# EAGLE board v1 (EAGLE 7.3.0)
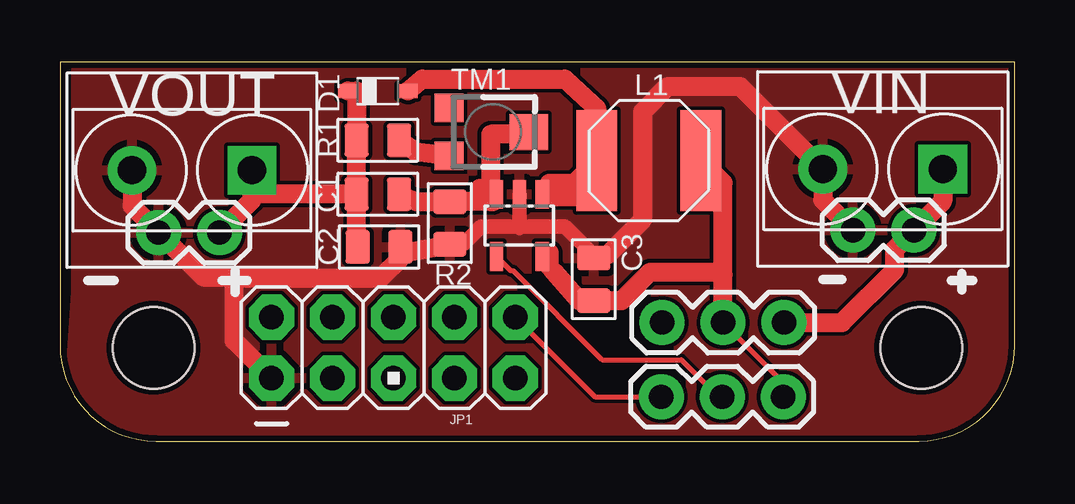
[diagram p0: board, top side]
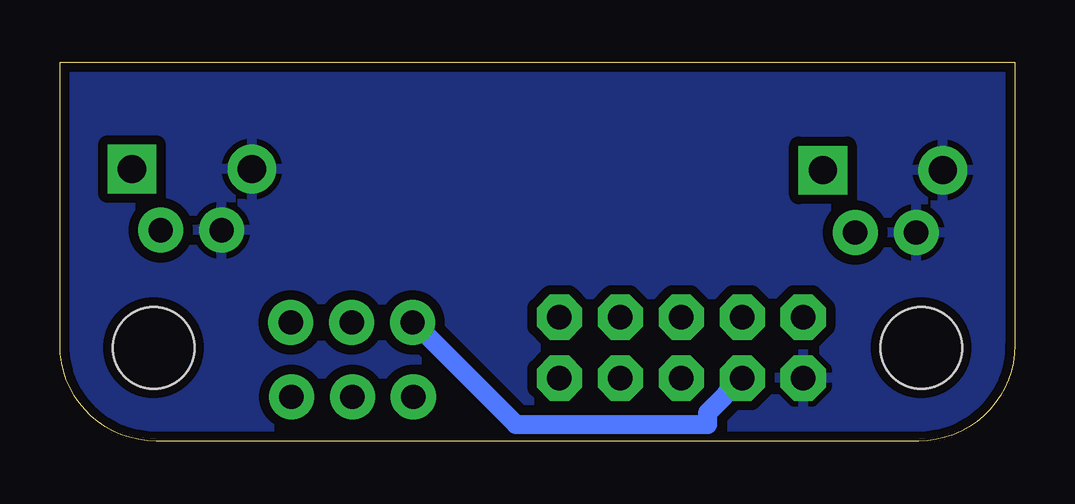
[diagram p1: board, bottom side, seen from below]

Size 39.8 x 15.8 mm. Coordinates in mm from the lower left corner, seen from the top.
Outline: 39.8,4 39.8,15.8 0,15.8 0,4 arc90 4,0 35.8,0 arc90 39.8,4
Copper layers (1*16): Top 0.035mm / dielectric 1.5mm / Bottom 0.035mm
Design rules "DFRobot_Eagle_Rule_v0.4": minimum track width 6mil, minimum drill 12mil, track to track 6mil, track to pad 6mil, pad to pad 6mil, via to via 6mil, smd to smd 0mil, copper to edge 10mil, drill to drill 10mil, minimum pad ring 12mil, minimum via ring 8mil, stop-mask expansion 2mil, vias tented up to drill 25mil, thermal gap 10mil
Holes 3.4 mm at 3.9,3.9 35.9,3.9

## Footprints (pad centres in the part's own frame; a part is rotated, then mirrored left to right if it is on the bottom)
C0805 = smd 1.397 x 1.016: 1 0,0.889; 2 0,-0.889
SOD323_ST = smd 0.8 x 0.6: A 1.25,0; C -1.25,0
SOT-23-5 = smd 0.55 x 1.2: 1 -0.95,-1.3; 2 0,-1.3; 3 0.95,-1.3; 4 0.95,1.3; 5 -0.95,1.3
AVR_ICSP = drill 1.016 pad 1.88 octagon: 1 -1.27,5.08; 2 1.27,5.08; 3 -1.27,2.54; 4 1.27,2.54; 5 -1.27,0; 6 1.27,0; 7 -1.27,-2.54; 8 1.27,-2.54; 9 -1.27,-5.08; 10 1.27,-5.08
1X02 = drill 1.016 pad 1.88: 1 0,0; 2 2.54,0
1X03 = drill 1.016 pad 1.88: 1 0,0; 2 2.54,0; 3 5.08,0
SMD-2P-5.0X5.0X2.0MM = smd 4.2 x 1.7: 1 0,2.175; 2 0,-2.175
R0805 = smd 1.397 x 1.016: 1 0,0.889; 2 0,-0.889
TC33X = smd 1.2 x 1.2: 1 -1,-1.825; 3 1,-1.825 | smd 1.5 x 1.6: 2 0,1.5
H2-5.0-10.5X8.0MM = drill 1.168 pad 2.032 square: 1 0,2.5 | drill 1.168 pad 2.032: 2 0,-2.5

## Placement (x,y rotation side)
C1  1uf  [C0805]  13.25,10.3 270 top
C2  1uf  [C0805]  13.3,8.1 270 top
C3  1uf  [C0805]  22.25,6.75 0 top
D1  BAT60J  [SOD323_ST]  13.25,14.6 0 top
IC1  IC_FAN5331-SOT-23-5  [SOT-23-5]  19.15,9 180 top
JP1  [AVR_ICSP]  13.9,3.9 90 top
JP2  [1X02]  6.65,8.7 180 top
JP5  [1X02]  35.6,8.8 180 top
JP6  [1X03]  30.15,1.85 180 top
JP7  [1X03]  25.1,4.95 0 top
L1  200UH  [SMD-2P-5.0X5.0X2.0MM]  24.55,11.7 90 top
R1  [R0805]  13.25,12.55 270 top
R2  [R0805]  16.25,9.1 180 top
TM1  [TC33X]  18.05,12.9 270 top
U$1  2p-5.08  [H2-5.0-10.5X8.0MM]  5.5,11.3 270 top
U$2  2p-5.08  [H2-5.0-10.5X8.0MM]  34.3,11.35 270 top

## Library data of the parts
C1-C3 = Seeed-OPL-Capacitor; MPN: CC0805KKX7R8BB105
D1 = diode
IC1 = dp_devices
JP1 JP2 JP5-JP7 = SparkFun-Connectors
L1 = Seeed-OPL-Inductor; MPN: SWPA5020S220MT
R1 R2 = Seeed-OPL-Resistor
TM1 = adafruit
U$1 U$2 = Seeed-OPL-Connector; MPN: GS009S-2P-2

## Nets
GND: C2.1 C3.1 IC1.2 JP1.1 JP2.2 JP5.2 R2.1 U$1.2 U$2.2
N$2: JP1.3 JP7.1
N$3: C3.2 IC1.5 JP6.1 JP7.2 L1.2
N$4: IC1.4 JP6.2
N$5: JP1.10 JP6.3
N$6: D1.A IC1.1 L1.1
N$8: C1.2 C2.2 D1.C JP2.1 R1.2 U$1.1
N$9: C1.1 IC1.3 R2.2 TM1.2
N$10: JP5.1 JP7.3 U$2.1
N$11: R1.1 TM1.3

## Tracks (layer width: path | path; a pad name or v marks a point on that pad's centre or on a via)
GND
  Top 0.6: IC1.2 19.15,8.9 | 19.15,8.9 19.1,8.95 17.55,8.95 16.81,8.21 R2.1 | 19.15,8.9 19.2,8.95 21.05,8.95 22.25,7.75 C3.1
  Top 0.8: U$1.2 3,9.81 JP2.2 5.96,6.85 7.2,6.85 7.25,6.8 | JP5.2 31.8,10.06 U$2.2 28.35,14.8 25.35,14.8 24.3,13.75 24.3,9.25 22.8,7.75 22.25,7.75 | 7.25,6.8 13.35,6.8 14.19,7.64 | 14.19,7.64 C2.1 | 14.19,7.64 14.41,7.86 R2.1 | JP1.1 7.25,4.2 7.25,6.8
  pour Bottom (isolate 0.4): 0.15,0.25 39.45,0.25 39.55,15.45 0.45,15.45 0.35,6.1
  pour Top (rank 2): 0.25,0.25 39.5,0.25 39.5,15.45 0.65,15.45 0.65,6.2
N$2
  Bottom 0.8: JP7.1 25.05,4.95 20.8,0.7 12.8,0.7 12.8,1.19 JP1.3
N$3
  Top 0.2: JP7.2 30.15,2.44 JP6.1 | 20.4,7.85 20.15,7.75 IC1.5
  Top 0.8: JP7.2 27.64,6.95 | 27.64,6.95 27.64,10.79 L1.2 | 27.64,6.95 27.54,7.05 24.6,7.05 23.41,5.86 C3.2 21.64,5.86 20.6,7.05 20.4,7.3 20.4,7.85
N$4
  Top 0.2: JP6.2 27.45,1.85 25.9,3.4 22.6,3.4 18.9,7.1 18.8,7.1 IC1.4
N$5
  Top 0.2: JP1.10 22.3,1.85 JP6.3
N$6
  Top 0.2: 21.5,10.2 21.5,10.3 IC1.1
  Top 0.8: D1.A 15.1,15.1 21.05,15.1 22.38,13.88 L1.1 21.42,10.75 20.4,10.75 20.4,10.2 21.5,10.2
N$8
  Top 0.8: U$1.1 8,10.3 | JP2.1 8,10.05 8,10.3 | D1.C 12.36,14.6 R1.2 C1.2 | C2.2 12.36,8.1 C1.2 | C1.2 8,10.3
N$9
  Top 0.2: IC1.3 18.2,10.2 17.5,10.2
  Top 0.8: C1.1 14.85,9.99 R2.2 17.95,9.99 | 17.5,10.2 17.5,10.55 18.05,10.55 18.05,9.99 17.95,9.99 | TM1.2 19.55,12.8 17.95,12.8 17.95,9.99
N$10
  Top 0.8: U$2.1 36.8,10 JP5.1 34.8,8 34.8,7.15 32.6,4.95 JP7.3
N$11
  Top 0.8: TM1.3 14.84,12.05 R1.1

## Text on the board
tNames: VIN | VOUT